# EAGLE board CT_schematic (EAGLE 7.6.0)

Size 100 x 80 mm. Coordinates in mm from the lower left corner, seen from the top.
Outline: 0,0 100,0 100,80 0,80 0,0
Copper layers (1*16): Top 0.035mm / dielectric 1.5mm / Bottom 0.035mm
Design rules "default": minimum track width 10mil, minimum drill 24mil, track to track 8mil, track to pad 8mil, pad to pad 8mil, via to via 8mil, smd to smd 8mil, copper to edge 40mil, drill to drill 8mil, minimum pad ring 10mil, minimum via ring 8mil, stop-mask expansion 4mil, vias tented up to drill 0mil, thermal gap 10mil

## Footprints (pad centres in the part's own frame; a part is rotated, then mirrored left to right if it is on the bottom)
C0603 = smd 0.8 x 0.8: 1 -0.762,0; 2 0.762,0
C0402 = smd 0.5 x 0.5: 1 -0.508,0; 2 0.508,0
C0805 = smd 1.2 x 1.3: 1 -1.016,0; 2 1.016,0
C1206 = smd 1.3 x 1.6: 1 -1.524,0; 2 1.524,0
L0603 = smd 0.8 x 0.8: 1 -0.762,0; 2 0.762,0
L0805 = smd 1.2 x 1.3: 1 -1.016,0; 2 1.016,0
R0603 = smd 0.8 x 0.8: 1 -0.762,0; 2 0.762,0
LQFP32 = smd 0.54 x 0.85: 1 -2.8,-4.275; 2 -2,-4.275; 3 -1.2,-4.275; 4 -0.4,-4.275; 5 0.4,-4.275; 6 1.19,-4.275; 7 1.99,-4.275; 8 2.79,-4.275; 17 2.8,4.275; 18 2,4.275; 19 1.2,4.275; 20 0.4,4.275; 21 -0.4,4.275; 22 -1.2,4.275; 23 -2,4.275; 24 -2.8,4.275 | smd 0.85 x 0.54: 9 4.275,-2.8; 10 4.275,-2; 11 4.275,-1.2; 12 4.275,-0.4; 13 4.275,0.4; 14 4.275,1.2; 15 4.275,2; 16 4.275,2.8; 25 -4.275,2.8; 26 -4.275,2; 27 -4.275,1.2; 28 -4.275,0.4; 29 -4.275,-0.4; 30 -4.275,-1.2; 31 -4.275,-2; 32 -4.275,-2.8
SOIC-8 = smd 1.6 x 0.6: 1 -2.7,1.905 | smd 1.55 x 0.6: 2 -2.7,0.635; 3 -2.7,-0.635; 4 -2.7,-1.905; 5 2.7,-1.905; 6 2.7,-0.635; 7 2.7,0.635; 8 2.7,1.905
SAMTEC_FTSH-105-01-L-DV-K = smd 0.762 x 2.794: 1 -2.54,-2.032; 2 -2.54,2.032; 3 -1.27,-2.032; 4 -1.27,2.032; 5 0,-2.032; 6 0,2.032; 7 1.27,-2.032; 8 1.27,2.032; 9 2.54,-2.032; 10 2.54,2.032
182-009-MALE = drill 1.194 pad 1.524 octagon: 1 -5.537,10.923; 2 -2.769,10.923; 3 0,10.923; 4 2.769,10.923; 5 5.537,10.923; 6 -4.153,8.08; 7 -1.384,8.08; 8 1.384,8.08; 9 4.153,8.08 | hole 3.048: -12.446,9.501; 12.446,9.501
ABLS-25.000MHZ-B2F-T = smd 5.6 x 2.8: 1 -3.81,0; 2 5.69,0
TSOT-23-5 = smd 1.3 x 0.62: 1 -1.31,0.95; 2 -1.31,0; 3 -1.31,-0.95; 4 1.31,-0.95; 5 1.31,0.95
DFN8_2X3MC = smd 0.813 x 0.305: 1 -1.398,0.75; 2 -1.398,0.25; 3 -1.398,-0.25; 4 -1.398,-0.75; 5 1.398,-0.75; 6 1.398,-0.25; 7 1.398,0.25; 8 1.398,0.75 | smd 1.753 x 1.549: 9 0,0
JST-2-SMD = smd 1 x 4.6: 1 -1,-3.7; 2 1,-3.7 | smd 1.6 x 3.4: NC1 -3.4,1.5; NC2 3.4,1.5
FCI_10118193-0001LF = smd 0.4 x 1.35: 1 -1.3,2.675; 2 -0.65,2.675; 3 0,2.675; 4 0.65,2.675; 5 1.3,2.675 | smd 1.6 x 1.4: 6 -3.2,2.45; 7 3.2,2.45 | smd 1.9 x 1.9: 8 -1.2,0; 9 1.2,0 | hole 0.5: -3.3,0; 3.3,0
SON-6 = smd 0.55 x 0.3: 1 -0.355,0.5 | smd 0.52 x 0.3: 2 -0.37,0; 3 -0.37,-0.5; 4 0.37,-0.5; 5 0.37,0; 6 0.37,0.5
SW_4-1437565-2 = smd 1.4 x 2.1: 1 -2.23,4.55; 2 -2.23,-4.55; 3 2.23,4.55; 4 2.23,-4.55
LGM67K-G1J2-24-Z = smd 0.8 x 1.4: A -2,0; C 0,0
NC7SZ125M5X = smd 1.3 x 0.7: 1 -1.3,0.95; 2 -1.3,0; 3 -1.3,-0.95; 4 1.3,-0.95; 5 1.3,0.95

## Placement (x,y rotation side)
C1  1e-07  [C0603]  -27.94,72.39 0 top  (outside the outline)
C2  1e-07  [C0603]  -31.75,72.39 0 top  (outside the outline)
C3  1e-07  [C0603]  -35.56,72.39 0 top  (outside the outline)
C4  1e-07  [C0603]  -39.37,72.39 0 top  (outside the outline)
C5  4.7e-06  [C0603]  -24.13,72.39 0 top  (outside the outline)
C6  1e-08  [C0603]  -43.18,72.39 0 top  (outside the outline)
C7  1e-06  [C0603]  -46.99,72.39 0 top  (outside the outline)
C8  1e-11  [C0402]  -22.86,77.47 0 top  (outside the outline)
C9  1e-11  [C0402]  -26.67,77.47 0 top  (outside the outline)
C10  1e-08  [C0402]  -30.48,77.47 0 top  (outside the outline)
C11  1e-07  [C0402]  -34.29,77.47 0 top  (outside the outline)
C12  1e-07  [C0402]  -38.1,77.47 0 top  (outside the outline)
C13  1e-05  [C0805]  -40.64,62.23 0 top  (outside the outline)
C14  1e-05  [C0805]  -45.72,62.23 0 top  (outside the outline)
C15  1e-07  [C0402]  -41.91,77.47 0 top  (outside the outline)
C16  1e-05  [C1206]  -16.51,62.23 0 top  (outside the outline)
C17  1e-05  [C1206]  -22.86,62.23 0 top  (outside the outline)
C18  1e-08  [C0402]  -45.72,77.47 0 top  (outside the outline)
C19  1e-08  [C0402]  -49.53,77.47 0 top  (outside the outline)
F1  240.0  [L0603]  -50.8,72.39 0 top  (outside the outline)
I1  2.2e-06  [L0805]  -50.8,62.23 0 top  (outside the outline)
R1  10000.0  [R0603]  -30.48,67.31 0 top  (outside the outline)
R2  1000.0  [R0603]  -54.61,72.39 0 top  (outside the outline)
R3  1600.5  [R0603]  -58.42,72.39 0 top  (outside the outline)
R4  4700.0  [R0603]  -62.23,72.39 0 top  (outside the outline)
R5  10000.0  [R0603]  -35.56,67.31 0 top  (outside the outline)
R6  10000.0  [R0603]  -40.64,67.31 0 top  (outside the outline)
R7  10000.0  [R0603]  -45.72,67.31 0 top  (outside the outline)
R8  10000.0  [R0603]  -50.8,67.31 0 top  (outside the outline)
R9  10000.0  [R0603]  -55.88,67.31 0 top  (outside the outline)
R10  10000.0  [R0603]  -60.96,67.31 0 top  (outside the outline)
R11  10000.0  [R0603]  -66.04,67.31 0 top  (outside the outline)
R12  5.0  [R0603]  -66.04,72.39 0 top  (outside the outline)
R13  120.0  [R0603]  -69.85,72.39 0 top  (outside the outline)
R14  470000.0  [R0603]  -68.58,62.23 0 top  (outside the outline)
R15  220000.0  [R0603]  -15.24,67.31 0 top  (outside the outline)
R16  1000000.0  [R0603]  -63.5,62.23 0 top  (outside the outline)
R17  10000.0  [R0603]  -71.12,67.31 0 top  (outside the outline)
R18  10000.0  [R0603]  -15.24,72.39 0 top  (outside the outline)
R19  9100.0  [R0603]  -15.24,77.47 0 top  (outside the outline)
R20  680000.0  [R0603]  -20.32,67.31 0 top  (outside the outline)
R21  120000.0  [R0603]  -25.4,67.31 0 top  (outside the outline)
R22  2000.0  [R0603]  -19.05,77.47 0 top  (outside the outline)
R23  10000.0  [R0603]  -20.32,72.39 0 top  (outside the outline)
U1  STM32F303K8T6  [LQFP32]  -53.34,29.21 0 top  (outside the outline)
U2  AT25160B-SSHL-T  [SOIC-8]  -58.42,41.91 0 top  (outside the outline)
U3  FTSH-105-01-L-DV-K  [SAMTEC_FTSH-105-01-L-DV-K]  -35.56,30.48 0 top  (outside the outline)
U4  SN65HVD230D  [SOIC-8]  -21.59,54.61 0 top  (outside the outline)
U5  182-009-113R531  [182-009-MALE]  -36.83,6.35 0 top  (outside the outline)
U6  ABLS-25.000MHZ-B2F-T  [ABLS-25.000MHZ-B2F-T]  -50.8,53.34 0 top  (outside the outline)
U7  ltc3406es5  [TSOT-23-5]  -55.88,60.96 0 top  (outside the outline)
U8  MCP73831T-2ACI/MC  [DFN8_2X3MC]  -58.42,76.2 0 top  (outside the outline)
U9  S2B-PH-SM4-TB(LF)(SN)  [JST-2-SMD]  -41.91,44.45 0 top  (outside the outline)
U10  10118193-0001LF  [FCI_10118193-0001LF]  -31.75,53.34 0 top  (outside the outline)
U11  TPS3895ADRYR  [SON-6]  -52.07,76.2 0 top  (outside the outline)
U12  4-1437565-2  [SW_4-1437565-2]  -27.94,43.18 0 top  (outside the outline)
U13  Q65110A2395  [LGM67K-G1J2-24-Z]  -62.23,52.07 0 top  (outside the outline)
U14  nc7sz125m5x  [NC7SZ125M5X]  -27.94,60.96 0 top  (outside the outline)
U15  nc7sz125m5x  [NC7SZ125M5X]  -34.29,60.96 0 top  (outside the outline)

## Library data of the parts
C1-C19 F1 I1 R1-R23 U1-U15 = circuit_tree

## Nets
CLK_CRYSTAL_U1_2: C8.1 U1.2 U6.1
CLK_CRYSTAL_U1_3: C9.1 U1.3 U6.2
GND: C1.2 C2.2 C3.2 C4.2 C5.2 C6.2 C7.2 C8.2 C9.2 C10.2 C11.2 C12.2 C13.2 C14.1 C14.2 C15.2 C16.2 C17.2 C18.2 C19.2 R2.2 R5.2 R12.2 R14.2 R15.2 R19.2 R21.2 R22.2 U1.16 U1.32 U2.4 U3.3 U3.5 U4.2 U5.5 U7.2 U8.6 U8.9 U9.2 U10.5 U10.6 U10.7 U10.8 U10.9 U11.2 U13.C U14.2 U14.3 U15.1 U15.3
INPUT_USBPOWER_5V: C16.1 R23.2 U8.1 U8.2 U10.1
NET_U1_4: R4.1 U1.4 U15.4
NET_U1_5: C6.1 C7.1 F1.1 U1.5
NET_U1_29: R3.1 U1.29 U13.A
NET_U1_30: R1.1 U1.30 U12.3 U12.4
NET_U1_31: R5.1 U1.31
NET_U2_3: R6.1 U2.3
NET_U2_7: R8.1 U2.7
NET_U3_9: R12.1 U3.9
NET_U4_6: R13.2 U4.6
NET_U4_8: R14.1 U4.8
NET_U5_2: R13.2 U4.6 U5.2
NET_U5_3: R13.1 U4.7 U5.3
NET_U7_1: U7.1
NET_U7_3: I1.1 U7.3
NET_U7_5: R15.1 R16.1 U7.5
NET_U7_ATNET_3: I1.2 R16.2
NET_U8_5: R23.1 U8.5
NET_U8_8: R22.1 U8.8
NET_U11_1: R18.1 R19.1 U11.1
NET_U11_3: R20.2 R21.1 U11.3
NET_U11_4: R17.1 U11.4 U14.4 U15.2
NET_U12_1: R2.1 U12.1 U12.2
PROC_CAN_RX: U1.21 U4.4
PROC_CAN_TX: U1.22 U4.1
PROC_SPI1_MISO: U1.12 U2.2
PROC_SPI1_MOSI: U1.13 U2.5
PROC_SPI1_NSS: R7.1 U1.10 U2.1
PROC_SPI1_SCK: U1.11 U2.6
PROC_SYS_JTCK_SWCLK: R10.1 U1.24 U3.4
PROC_SYS_JTDO_TRACESWO: U1.26 U3.6
PROC_SYS_JTMS_SWDIO: R11.1 U1.23 U3.2
RST_OUT_U3_JTAG_RST_B: R9.1 U3.10 U14.1
VCC_S1_3V7: C13.1 C17.1 U7.4 U8.3 U8.4 U9.1
VCC_TIER1_3V3: C1.1 C2.1 C3.1 C4.1 C5.1 C10.1 C11.1 C12.1 C14.2 C15.1 C18.1 C19.1 F1.2 I1.2 R1.2 R3.2 R4.2 R6.2 R7.2 R8.2 R9.2 R10.2 R11.2 R16.2 R17.2 R18.2 R20.1 U1.1 U1.17 U2.8 U3.1 U4.3 U11.6 U14.5 U15.5

## Tracks (layer width: path | path; a pad name or v marks a point on that pad's centre or on a via)
CLK_CRYSTAL_U1_2  (2 unrouted)
CLK_CRYSTAL_U1_3  (2 unrouted)
GND  (49 unrouted)
INPUT_USBPOWER_5V  (4 unrouted)
NET_U1_4  (2 unrouted)
NET_U1_5  (3 unrouted)
NET_U1_29  (2 unrouted)
NET_U1_30  (3 unrouted)
NET_U1_31  (1 unrouted)
NET_U2_3  (1 unrouted)
NET_U2_7  (1 unrouted)
NET_U3_9  (1 unrouted)
NET_U4_6  (1 unrouted)
NET_U4_8  (1 unrouted)
NET_U5_2  (2 unrouted)
NET_U5_3  (2 unrouted)
NET_U7_3  (1 unrouted)
NET_U7_5  (2 unrouted)
NET_U7_ATNET_3  (1 unrouted)
NET_U8_5  (1 unrouted)
NET_U8_8  (1 unrouted)
NET_U11_1  (2 unrouted)
NET_U11_3  (2 unrouted)
NET_U11_4  (3 unrouted)
NET_U12_1  (2 unrouted)
PROC_CAN_RX  (1 unrouted)
PROC_CAN_TX  (1 unrouted)
PROC_SPI1_MISO  (1 unrouted)
PROC_SPI1_MOSI  (1 unrouted)
PROC_SPI1_NSS  (2 unrouted)
PROC_SPI1_SCK  (1 unrouted)
PROC_SYS_JTCK_SWCLK  (2 unrouted)
PROC_SYS_JTDO_TRACESWO  (1 unrouted)
PROC_SYS_JTMS_SWDIO  (2 unrouted)
RST_OUT_U3_JTAG_RST_B  (2 unrouted)
VCC_S1_3V7  (5 unrouted)
VCC_TIER1_3V3  (34 unrouted)